# EAGLE board Supply_Gambar Teknik(Pangeran Antonius) (EAGLE 9.6.2)
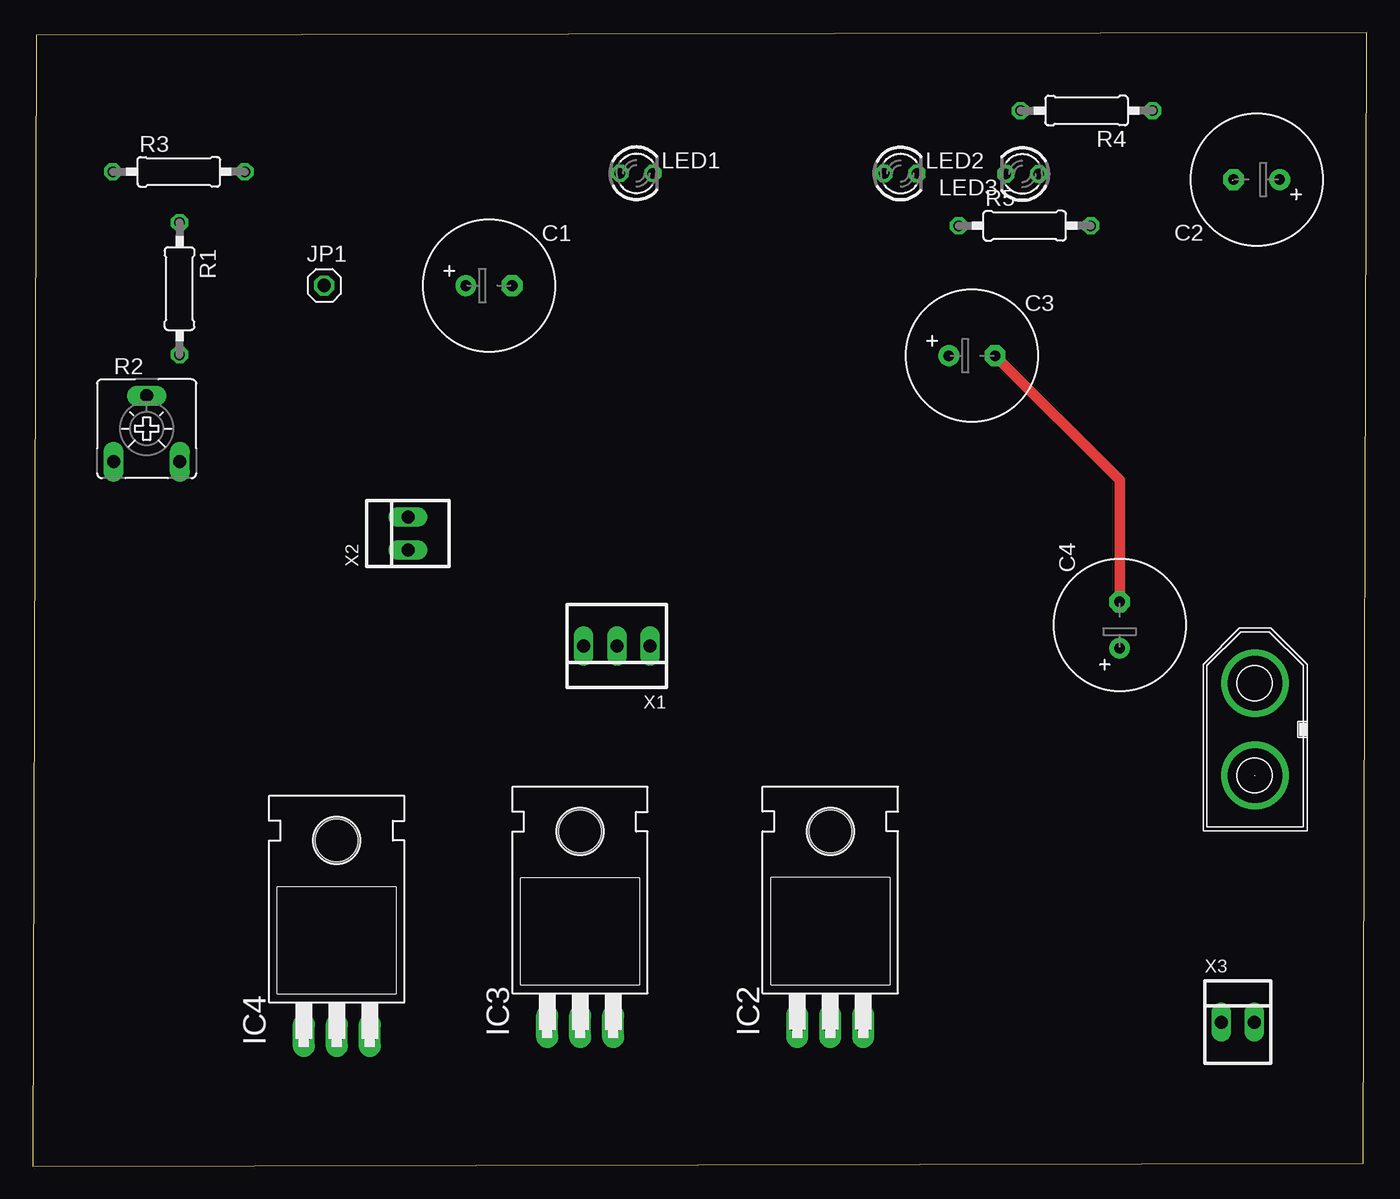
[diagram p0: board, top side]
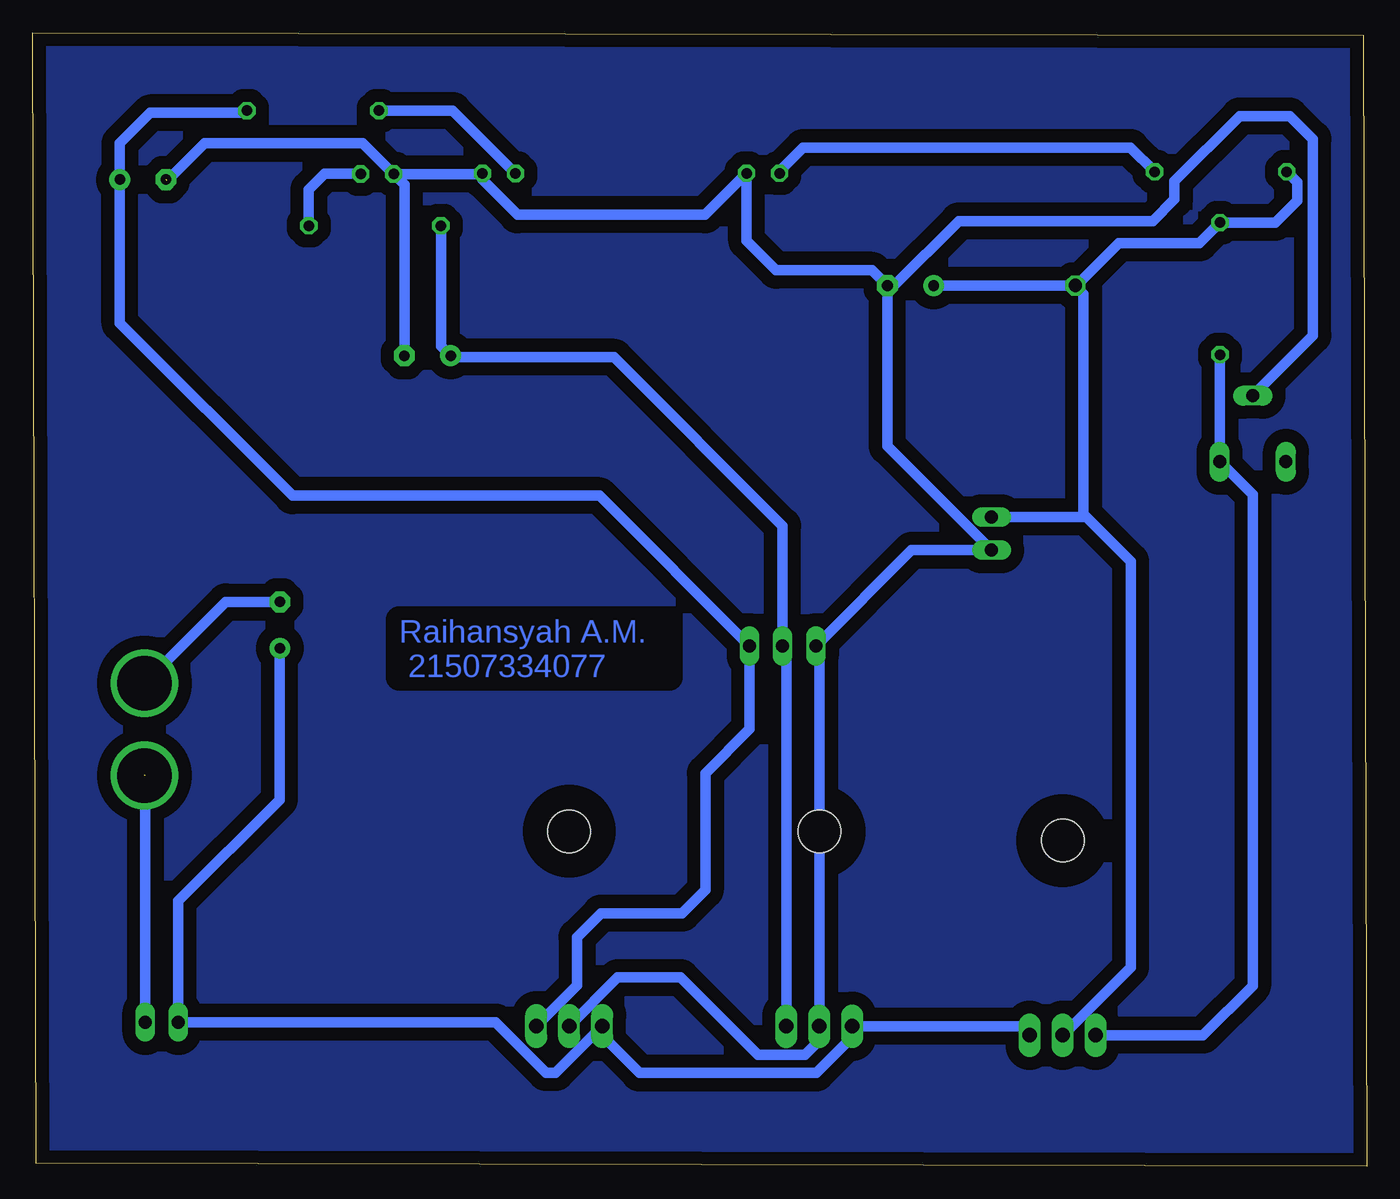
[diagram p1: board, bottom side, seen from below]

Size 102.67 x 87.24 mm. Coordinates in mm from the lower left corner, seen from the top.
Outline: 0,0 102.39,0.22 102.67,87.24 0.28,87.02 0,0
Copper layers (1*16): Top 0.035mm / dielectric 1.5mm / Bottom 0.035mm
Design rules "default": minimum track width 6mil, minimum drill 0.35mm, track to track 6mil, track to pad 6mil, pad to pad 6mil, via to via 6mil, smd to smd 6mil, copper to edge 40mil, drill to drill 6mil, minimum pad ring 10mil, minimum via ring 8mil, stop-mask expansion 4mil, vias tented up to drill 0mil, thermal gap 10mil

## Footprints (pad centres in the part's own frame; a part is rotated, then mirrored left to right if it is on the bottom)
E3,5-10 = drill 0.813 pad 1.6: + -1.778,0 | drill 0.813 pad 1.6 octagon: - 1.778,0
TO220H = drill 1.118 long: 1 -2.54,-10.16; 2 0,-10.16; 3 2.54,-10.16 | hole 3.302: 0,4.826
1X01 = drill 1.016 octagon: 1 0,0
LED3MM = drill 0.813 octagon: A -1.27,0; K 1.27,0
0207/10 = drill 0.813 octagon: 1 -5.08,0; 2 5.08,0
CA6V = drill 1.016 long: A -2.54,-2.54; E 2.54,-2.54; S 0,2.54
CON-XT60M = drill 4.2: V+ -3.55,0; V- 3.55,0
22-23-2031 = drill 1 long: 1 -2.54,0; 2 0,0; 3 2.54,0
22-23-2021 = drill 1 long: 1 -1.27,0; 2 1.27,0

## Placement (x,y rotation side)
C1  1000uF/16V  [E3,5-10]  35.12,67.76 0 top
C2  1000uF/16V  [E3,5-10]  94.18,75.92 180 top
C3  1000uF/16V  [E3,5-10]  72.28,62.38 0 top
C4  1000uF/16V  [E3,5-10]  83.64,41.65 90 top
IC2  7805T  [TO220H]  61.39,20.95 0 top
IC3  7805T  [TO220H]  42.13,20.94 0 top
IC4  317T  [TO220H]  23.41,20.24 0 top
JP1  [1X01]  22.45,67.78 0 top
LED1  [LED3MM]  46.46,76.41 0 top
LED2  [LED3MM]  66.78,76.4 0 top
LED3  [LED3MM]  76.15,76.36 180 top
R1  1K2  [0207/10]  11.31,67.53 270 top
R2  20K  [CA6V]  8.78,56.76 0 top
R3  1K  [0207/10]  11.26,76.52 0 top
R4  1K  [0207/10]  81.1,81.23 180 top
R5  1K  [0207/10]  76.33,72.37 0 top
VIN  [CON-XT60M]  94.06,33.62 90 top
X1  VSYS  [22-23-2031]  44.95,40.04 180 top
X2  VMOT  [22-23-2021]  28.89,48.68 90 top
X3  switch  [22-23-2021]  92.72,11.09 0 top

## Library data of the parts
C1-C4 R1 R3-R5 = rcl
IC2-IC4 = linear
JP1 = pinhead
LED1-LED3 = led
R2 = pot
VIN = con-XT60M
X1 = con-molex; MF: MOLEX; MPN: 22-23-2031; OC_FARNELL: 1462950; OC_NEWARK: 30C0862
X2 X3 = con-molex; MF: MOLEX; MPN: 22-23-2021; OC_FARNELL: 1462926; OC_NEWARK: 25C3832

## Nets
+12V: C3.+ IC3.3 R5.1 X1.2
GND: C1.- C2.- C3.- C4.- IC2.2 IC3.2 LED1.K LED2.K LED3.K R2.S VIN.V- X1.3 X2.1
N$1: IC4.1 R1.2 R2.E
N$2: LED1.A R3.2
N$3: LED3.A R5.2
N$4: VIN.V+ X3.2
N$5: LED2.A R4.2
VCC: C2.+ IC2.3 R4.1 X1.1
VDD: C1.+ IC4.2 JP1.1 R1.1 R3.1 X2.2
VPP: C4.+ IC2.1 IC3.1 IC4.3 X3.1

## Tracks (layer width: path | path; a pad name or v marks a point on that pad's centre or on a via)
+12V
  Bottom 0.813: R5.1 71.25,63.13 C3.+ 70.37,62.25 57.93,62.25 44.95,49.28 X1.2 44.67,39.75 IC3.3
GND  (1 unrouted)
  Top 0.813: C4.- 83.64,52.79 C3.-
  Bottom 0.813: 42.38,11.02 IC3.2 | C1.- 38.08,68.95 45.46,68.95 47.73,71.22 LED1.K 50.93,73.21 65.36,73.21 68.05,75.9 LED2.K 68.09,76.36 LED3.K | VIN.V- 87.8,43.43 C4.- | 92.3,75.83 89.41,78.72 77.26,78.72 LED3.K | R2.S 4.17,63.92 4.17,79.03 5.95,80.81 9.79,80.81 14.82,75.78 14.82,74.4 16.49,72.74 31.41,72.74 36.39,67.76 C1.- | C1.- 36.9,55.41 X2.1 35.04,47.41 X1.3 42.13,39.75 IC3.2 | C3.- 74.06,75.53 LED3.K | IC2.2 57.65,14.53 52.81,14.53 46.86,8.58 43.24,8.58 42.13,9.69 IC3.2
N$1
  Bottom 0.813: R1.2 11.33,62.44 R2.E 8.8,51.7 8.8,13.91 12.63,10.09 IC4.1
N$2
  Bottom 0.813: R3.2 18.2,78.39 43.39,78.39 45.19,76.58 LED1.A
N$3
  Bottom 0.813: LED3.A 77.46,76.4 80.18,76.4 81.41,75.16 R5.2
N$4  (1 unrouted)
  Bottom 0.813: 93.99,30.07 X3.2
N$5
  Bottom 0.813: LED2.A 70.35,81.23 R4.2
S$1
  pour Bottom (isolate 1.016): -0.2,-0.11 102.29,-0.11 102.29,1.11 102.32,1.11 102.32,87.03 0.18,86.9
VCC
  Bottom 0.813: 63.95,10.36 64.06,10.25 64.06,10.65 IC2.3 60.78,13.94 60.78,17.63 58.94,19.47 52.7,19.47 50.91,21.26 50.91,30.24 47.49,33.66 X1.1 59.05,51.6 82.68,51.6 95.96,64.88 C2.+ 95.96,78.7 93.61,81.05 86.36,81.05 R4.1
VDD
  Bottom 0.813: 11.17,72.48 R1.1 | R3.1 5.36,75.71 5.36,74.31 7.06,72.61 R1.1 | R1.1 12.89,71.04 19.11,71.04 22.37,67.78 JP1.1 | JP1.1 C1.+ | IC4.2 18.18,15.32 18.18,46.55 21.58,49.95 21.82,49.95 | 21.82,49.95 X2.2 | JP1.1 21.82,67.12 21.82,49.95
VPP
  Bottom 0.813: 59.21,10.43 IC2.1 | C4.+ 83.67,39.84 83.67,28.21 91.45,20.43 X3.1 67.04,11.09 63.16,7.21 62.43,7.21 59.21,10.43 | 59.21,10.43 55.97,7.19 42.37,7.19 39.59,9.97 IC3.1 26.64,10.78 IC4.3

## Text on the board
Bottom: Raihansyah A.M. / 21507334077